# Altium PCB esp_altimeter_evo1.PcbDoc
Units mm, origin at the board's own origin, x right, y up, seen from the top; angles counter-clockwise.
Board outline 18.75 x 26.5 mm, 2 copper layers (Top Layer, Bottom Layer); 27 components, 18 nets, 87 pads, 22 vias.
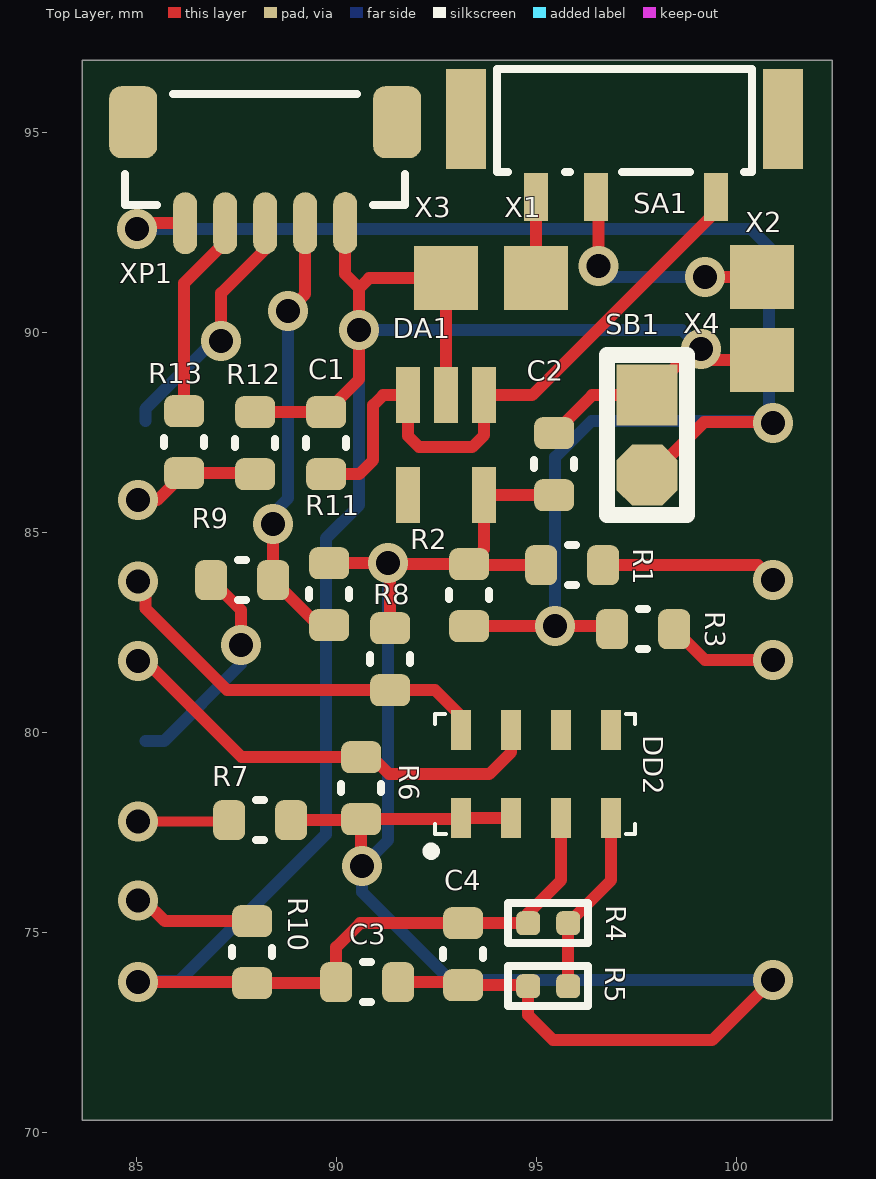
[diagram p0: Top Layer view]
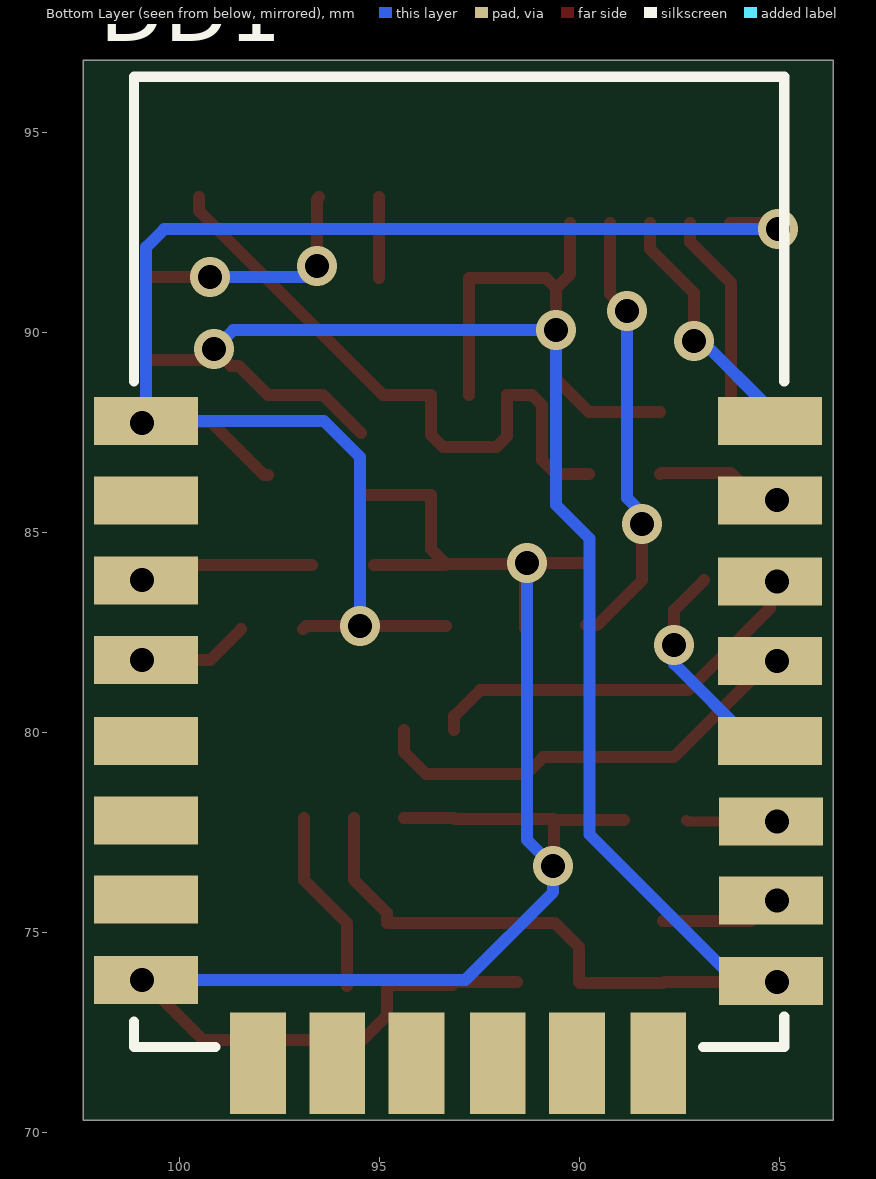
[diagram p1: Bottom Layer view, seen from below]
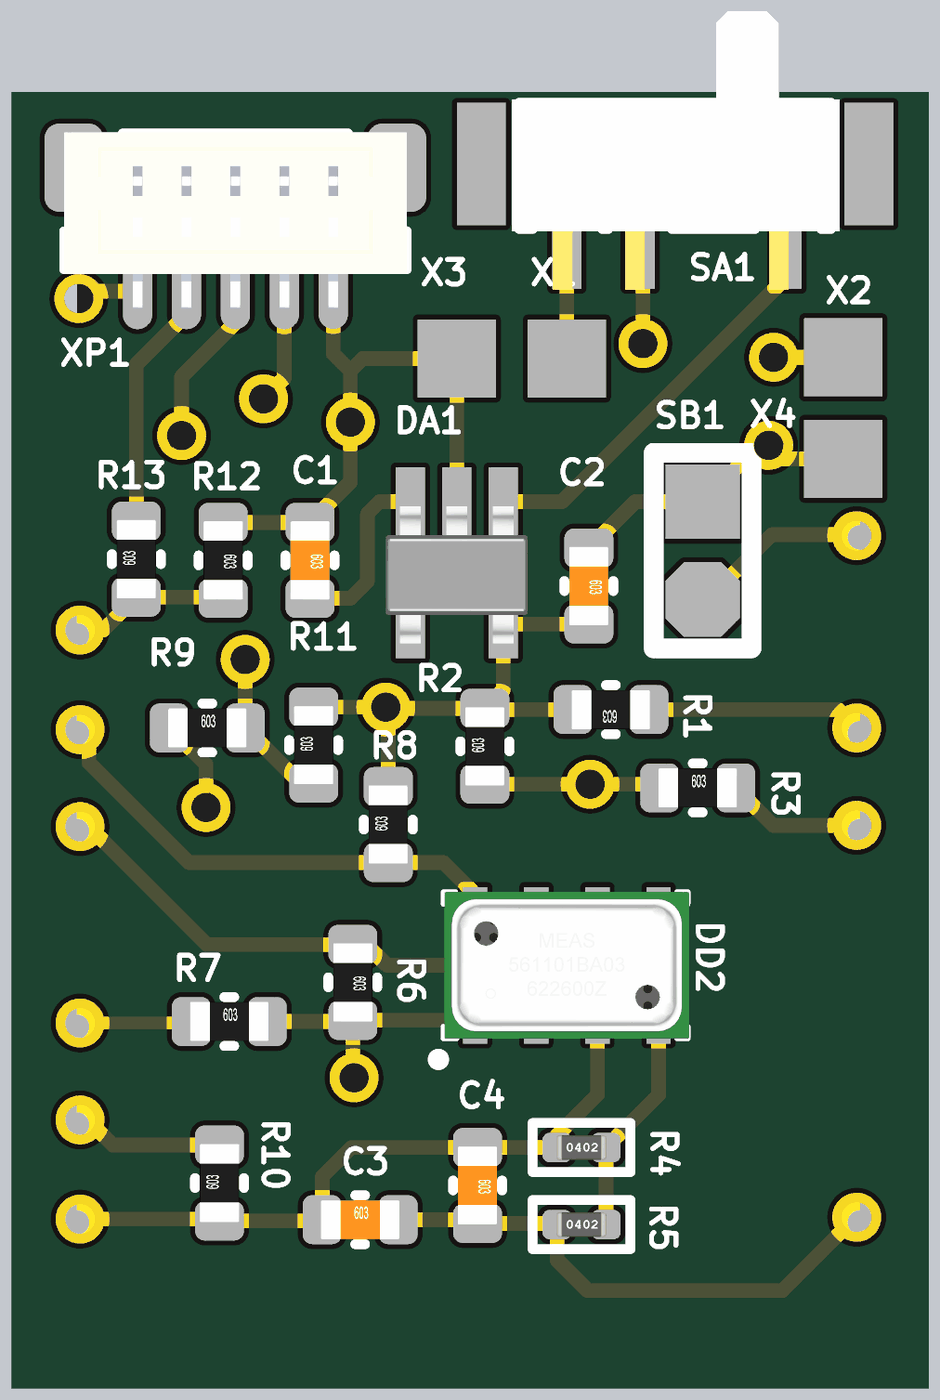
[diagram p2: 3D render of the assembled board from above, using the file's embedded part models]

## Layer stack, top to bottom
Top Solder: solder mask 0.0102, Solder Resist, Dk 3.5
Top Layer: signal copper 0.0356
Dielectric 1: dielectric 0.32, FR-4, Dk 4.8
Bottom Layer: signal copper 0.0356
Bottom Solder: solder mask 0.0102, Solder Resist, Dk 3.5

## Board outline
83.65,70.3 102.4,70.3 102.4,96.8 83.65,96.8

## Design rules (kind name [scope] priority, off if disabled: settings)
Clearance [All] p1: gap=0.254 ignorepadtopadclearanceinfootprint=FALSE except(0: Arc-Hole Track-Hole SMDPad-Hole THPad-Hole Via-Hole Fill-Hole Poly-Hole Region-Hole Text-Hole)
PolygonConnect [All] p1: connectstyle=Relief reliefconductorwidth=0.254 reliefentries=4 polygonreliefangle="90 Angle" airgapwidth=0.254
RoutingVias [All] p1: holewidth=0.3 width=0.6 viastyle="Through Hole" minholewidth=0.3 minwidth=0.6 maxholewidth=1.5 maxwidth=10
SolderMaskExpansion [All] p1: expansion=0.102
Width [All] p1: maxlimit=2.5 minlimit=0.2 preferedwidth=0.2
30 further rules are at their usual default settings.

## Components (designator, comment, footprint, x,y, rotation, side; value= is the part's Value field where it differs from the comment)
C1 "Cap EIA 0603" "CAP EIA 0603" 89.75,87.225 r270 top value=1uF
C2 "Cap EIA 0603" "CAP EIA 0603" 95.45,86.7 r270 top value=1uF
C3 "Cap EIA 0603" "CAP EIA 0603" 90.775,73.75 r0 top value=0.1uF
C4 "Cap EIA 0603" "CAP EIA 0603" 93.175,74.45 r270 top value=100nF
DA1 "LD39015" SOT23-5L 92.75,86.925 r0 top
DD1 "ESP8266 ESP-12E-RU" "ESP8266 ESP-12-E" 84.239,71.369 r180 bottom
DD2 "MS5611" MS5611 94.975,78.95 r90 top
R1 "Res EIA 0603" "RES EIA 0603" 95.9,84.175 r180 top value=10k
R2 "Res EIA 0603" "RES EIA 0603" 93.325,83.425 r90 top value=10k
R3 "Res EIA 0603" "RES EIA 0603" 97.675,82.575 r0 top value=470
R4 "Res EIA 0402" "RES EIA 0402" 95.3,75.225 r0 top value=0
R5 "Res EIA 0402" "RES EIA 0402" 95.3,73.65 r0 top value=0
R6 "Res EIA 0603" "RES EIA 0603" 90.625,78.6 r270 top value=10k
R7 "Res EIA 0603" "RES EIA 0603" 88.1,77.8 r0 top value=10k
R8 "Res EIA 0603" "RES EIA 0603" 91.35,81.825 r90 top value=10k
R9 "Res EIA 0603" "RES EIA 0603" 87.65,83.8 r0 top value=10k
R10 "Res EIA 0603" "RES EIA 0603" 87.9,74.5 r90 top value=10k
R11 "Res EIA 0603" "RES EIA 0603" 89.825,83.45 r90 top value=10k
R12 "Res EIA 0603" "RES EIA 0603" 87.975,87.225 r270 top value=22k
R13 "Res EIA 0603" "RES EIA 0603" 86.2,87.25 r90 top value=10k
SA1 "IS-1290" IS-1290F 97.275,95.275 r180 top
SB1 "RESET" SB_Pad 97.775,87.425 r270 top
X1 "Charger_+" Surface_Pad 95,91.35 r0 top
X2 "Battery+" Surface_Pad 100.65,91.375 r0 top
X3 "BatteryGND" Surface_Pad 92.75,91.35 r0 top
X4 "Charger_GND" Surface_Pad 100.65,89.3 r0 top
XP1 "BM05B-SRSS-TB" BM05B-SRSS-TB 88.225,94.45 r0 top value="Разъем штыревой 5-и контактный угловой"

## Footprints (in the part's own frame and the unit in brackets; to place one, negate y for a bottom-side part, rotate by r counter-clockwise, add the part's x,y. Pads: shape width x height; smd on the part's side, far side on the other; paste and mask are expansions set on the pad)
BM05B-SRSS-TB [mm]
  rrect50% 1.2x1.8 smd: 0(-3.3,0.8) 0(3.3,0.8)
  oval 0.6x1.55 smd: 1(-2,-1.725) 2(-1,-1.725) 3(0,-1.725) 4(1,-1.725) 5(2,-1.72)
  silkscreen extent -3.5,-1.28 3.5,1.5, body extent -3.5,-2.07 3.5,1.53, height 4.25
"CAP EIA 0603" [mm] "Chip Resistor, 2-Leads, Body 1.57x0.85mm, IPC Medium Density"
  rrect50% 0.8x1 smd: 1(-0.775,0) 2(0.775,0)
  silkscreen extent -0.1,-0.5 0.1,0.5, body extent -0.8,-0.4 0.8,0.4, height 0.3
"ESP8266 ESP-12-E" [mil] "ESP8266 ESP-12-E"
  rect 102.36x47.24 smd: 1(-653,646) 2(-653,568) 3(-653,489) 4(-653,411) 5(-653,331) 6(-653,253) 7(-653,175) 8(-653,96) 15(-38,95) 16(-38,174) 17(-38,252) 18(-39,331) 19(-39,410) 20(-39,488) 21(-39,568) 22(-39,646)
  rect 55x100 smd: 9(-543,14) 10(-465,14) 11(-387,14) 12(-307,14) 13(-229,14) 14(-149,14)
  silkscreen extent -665,30 -25,985, body extent -660,32 -29,977, height 104
IS-1290F [mm]
  rect 1x2.5 smd: 0(-3.9,-0.05) 0(4.025,-0.05)
  rect 0.6x1.2 smd: 1(-2.225,1.9) 2(0.775,1.9) 3(2.275,1.9)
  silkscreen extent -3.13,-1.3 3.25,1.28, body extent -3.3,-3.18 3.4,2.53, height 1.42
MS5611 [mm]
  rect 1x0.5 smd: 1(-1.1,1.85) 2(-1.1,0.6) 3(-1.1,-0.65) 4(-1.1,-1.9) 5(1.1,-1.9) 6(1.1,-0.65) 7(1.1,0.6) 8(1.1,1.85)
  silkscreen extent -2.02,-2.5 1.5,2.69, body extent -1.5,-2.52 1.5,2.48, height 1.02
"RES EIA 0402" [mm] "Chip Resistor, 2-Leads, Body 1,00x0,50mm, IPC Medium Density"
  rrect50% 0.6x0.6 smd: 1(-0.5,0) 2(0.5,0)
  silkscreen extent -1,-0.5 1,0.5, body extent -0.51,-0.25 0.51,0.25, height 0.51
"RES EIA 0603" [mm] "Chip Resistor, 2-Leads, Body 1.57x0.85mm, IPC Medium Density"
  rrect50% 0.8x1 smd: 1(-0.775,0) 2(0.775,0)
  silkscreen extent -0.1,-0.5 0.1,0.5, body extent -0.8,-0.4 0.8,0.4, height 0.3
SB_Pad [mil]
  rect 60x60 smd: 1(-39.37,0)
  oct 60x60 smd: 2(39.37,0)
  silkscreen extent -79,-39 79,39
SOT23-5L [mm]
  rect 0.6x1.4 smd: 1(0.95,1.5) 2(0,1.5) 3(-0.95,1.5) 4(-0.95,-1) 5(0.95,-1)
  body extent -1.45,-1.4 1.45,1.4, height 1.07
Surface_Pad [mm]
  rect 1.6x1.6 smd: 1(0,0)

## Part data
DD1: Manufacturer=Espressif, Documentation=https://www.espressif.com/sites/default/files/documentation/0a-esp8266ex_datasheet_en.pdf, Group=Microcontrollers, Name=ESP8266-12E, Price=1,7$
SB1: library part SB_Pad
X1 X2 X3 X4: library part Surface_Pad
XP1: "5-Pin Angle Connector", Manufacturer=JST, Group=Разъемы, Name=BM05B-SRSS-TB, Supplier="ООО\"Компэл\""
C1 C2 C3 C4: Group=Конденсаторы
R1 R2 R3 R4 R5 R6 R7 R8 R10 R11 R12 R13: Group=Резисторы
R9: Group=Резисторы, Name=BURN
SA1: Group=Переключатели, Name=IS-1290

## Via types
v1: diameter 1, hole 0.6, Top Layer to Bottom Layer, 22 vias

## Nets (pads, with @x,y where several pads share a name; then routed paths per layer and width w, separated by ;. In a path a pad name is that pad's centre, name@x,y a point inside that pad or via, vN(x,y) a via of type N, cw(c..) or ccw(c..) an arc to the next point about the centre after c; other vN are vias at no path point)
+3.3V: C2.2 C3.2 C4.2 DA1.5 DD1.8 DD2.1 DD2.2 R1.2 R2.2 R5.1 R6.2 R7.2 R8.2 R11.2 | length 47.9
  Top Layer w0.3: R7.2 90.6,77.8 R6.2 ; R11.2 v1@91.225,84.225 ; v1(90.65,76.65) 90.625,76.675 R6.2 ; v1(91.3,84.225) v1@91.225,84.225 ; R8.2 91.35,84.1 v1@91.25,84.2 ; C3.2 93.1,73.75 C4.2 94.775,73.675 R5.1 94.8,72.925 95.425,72.3 99.4,72.3 v1@100.9,73.8 ; DD2.2 DD2.1 93.1,77.825 R6.2 ; R1.2 93.35,84.175 R2.2 ; C2.2 DA1.5 93.7,84.575 R2.2 ; v1@91.225,84.225 v1@91.25,84.2 ; v1@91.25,84.2 R2.2
  Bottom Layer w0.3: v1(91.3,84.225) 91.3,77.3 v1(90.65,76.65) 90.65,76 92.842,73.808 DD1.8
  other v1: 100.925,73.8
Ardu_RX: R13.2 XP1.2 | length 5.1
  Top Layer w0.3: R13.2 86.2,91.229 87.225,92.254 XP1.2
Ardu_TX: DD1.22 XP1.3 | length 6.3
  Top Layer w0.3: v1(87.125,89.775) 87.125,90.975 88.225,92.075 XP1.3
  Bottom Layer w0.3: DD1.22 85.23,88.08 86.925,89.775 v1(87.125,89.775)
DTR: R9.2 R11.1 XP1.4 | length 11.5
  Top Layer w0.3: v1@88.767,85.2 v1(88.425,85.2) R9.2 89.55,82.675 R11.1 ; v1(88.8,90.525) 89.225,90.95 XP1.4
  Bottom Layer w0.3: v1(88.425,85.2) 88.425,85.475 88.8,85.85 v1(88.8,90.525)
GND: C1.1 C2.1 C3.1 C4.1 DA1.2 DD1.15 DD2.3 R4.1 R10.1 R12.1 SB1.1 X3.1 X4.1 XP1.5 | length 59.9
  Top Layer w0.3: v1@85.225,73.762 87.863,73.762 R10.1 89.975,73.725 C3.1 90,74.625 90.6,75.225 C4.1 R4.1 94.8,75.475 95.625,76.3 DD2.3 ; R12.1 C1.1 90.575,88.825 v1(90.575,90.05) 90.575,91.1 ; XP1.5 90.225,91.45 90.575,91.1 ; DA1.2 X3.1 90.825,91.35 90.575,91.1 ; C2.1 96.4,88.425 SB1.1 98.5,89.15 98.7,89.15 v1(99.125,89.575) 99.4,89.3 X4.1
  Bottom Layer w0.3: DD1.15@85.225,73.762 DD1.15 86.082,73.782 89.746,77.446 89.746,84.846 90.575,85.675 v1(90.575,90.05) 98.65,90.05 v1(99.125,89.575)
  other v1: 85.05,73.762
NetC1_2: C1.2 DA1.1 DA1.3 SA1.1 | length 15.9
  Top Layer w0.3: C1.2 90.575,86.45 90.925,86.8 90.925,88.175 91.175,88.425 DA1.3 91.8,87.4 92.075,87.125 93.4,87.125 93.7,87.425 DA1.1 94.9,88.425 99.5,93.025 SA1.1
NetDD1_3: DD1.3 R1.1 | length 4.4
  Top Layer w0.3: R1.1 100.55,84.175 v1(100.925,83.8)
NetDD1_4: DD1.4 R3.2 | length 2.7
  Top Layer w0.3: R3.2 99.216,81.809 v1@100.825,81.809
  other v1: 100.925,81.809
NetDD1_16: DD1.16 R10.2 | length 3
  Top Layer w0.3: v1@85.204,75.789 85.718,75.275 R10.2
  Bottom Layer w0.254: DD1.16 DD1.16@85.243,75.75
  other v1: 85.05,75.789
NetDD1_17: DD1.17 R7.1 | length 2.1
  Top Layer w0.254: v1@85.204,77.77 87.295,77.77 R7.1
  other v1: 85.05,77.77
NetDD1_18: DD1.18 R9.1 | length 5.6
  Top Layer w0.3: R9.1 87.625,83.05 v1(87.625,82.175)
  Bottom Layer w0.3: DD1.18 85.694,79.777 87.625,81.707 v1(87.625,82.175)
NetDD1_21: DD1.21 R12.2 R13.1 | length 3.2
  Top Layer w0.3: v1(85.05,85.8) 85.525,85.8 R13.1 87.95,86.475 R12.2
NetDD2_4: DD2.4 R4.2 R5.2 | length 4.6
  Top Layer w0.3: R5.2 R4.2 96.875,76.3 DD2.4
NetSA1_2: SA1.2 X2.1 | length 6.3
  Top Layer w0.3: v1@96.5,91.709 v1(96.555,91.654) 96.555,93.32 SA1.2 ; v1(99.225,91.375) X2.1
  Bottom Layer w0.3: v1(96.555,91.654) 96.5,91.6 96.5,91.375 v1(99.225,91.375)
NetSA1_3: SA1.3 X1.1 | length 2
  Top Layer w0.3: X1.1 SA1.3
RTS: DD1.1 R2.1 R3.1 SB1.2 XP1.1 | length 38.8
  Top Layer w0.3: v1(85.025,92.575) 85.175,92.725 XP1.1 ; R2.1 v1(95.475,82.65) 96.825,82.65 R3.1 ; SB1.2 97.87,86.425 99.195,87.75 100.884,87.75 v1@100.905,87.729
  Bottom Layer w0.3: v1(85.025,92.575) 100.375,92.575 100.825,92.125 DD1.1 96.378,87.778 95.475,86.875 v1(95.475,82.65)
  other v1: 100.925,87.729
SCL: DD1.20 DD2.8 R8.1 | length 10
  Top Layer w0.3: v1@85.23,83.765 85.23,83.095 87.275,81.05 R8.1 92.475,81.05 93.125,80.4 DD2.8
  other v1: 85.05,83.765
SDA: DD1.19 DD2.7 R6.1 | length 11.1
  Top Layer w0.3: v1@85.23,81.783 87.638,79.375 R6.1 90.9,79.375 91.325,78.95 93.825,78.95 94.375,79.5 DD2.7
  other v1: 85.05,81.783
pads on no net: DA1.4 DD1.2 DD1.5 DD1.6 DD1.7 DD1.9 DD1.10 DD1.11 DD1.12 DD1.13 DD1.14 DD2.5 DD2.6 SA1.0 XP1.0

## Silkscreen, mask and mechanical layers (free items; w line width, h text height)
Mechanical 1:
  the board outline again, w0.3

## Text inside footprints (layer, text, board x,y; h text height)
DD1: Mechanical 13 "ANTENNA AREA" at 100.824,95.768 h0.25; Mechanical 13 "CUTOUT POLYGON" at 100.824,95.26 h0.25